# Altium PCB Siren_Buzzer Mounting PCB.PcbDoc
Units mm, origin at the board's own origin, x right, y up, seen from the top; angles counter-clockwise.
Board outline 22.1 x 21.72 mm, 2 copper layers (Top Layer, Bottom Layer); 2 components, 2 nets, 10 pads, 23 vias.
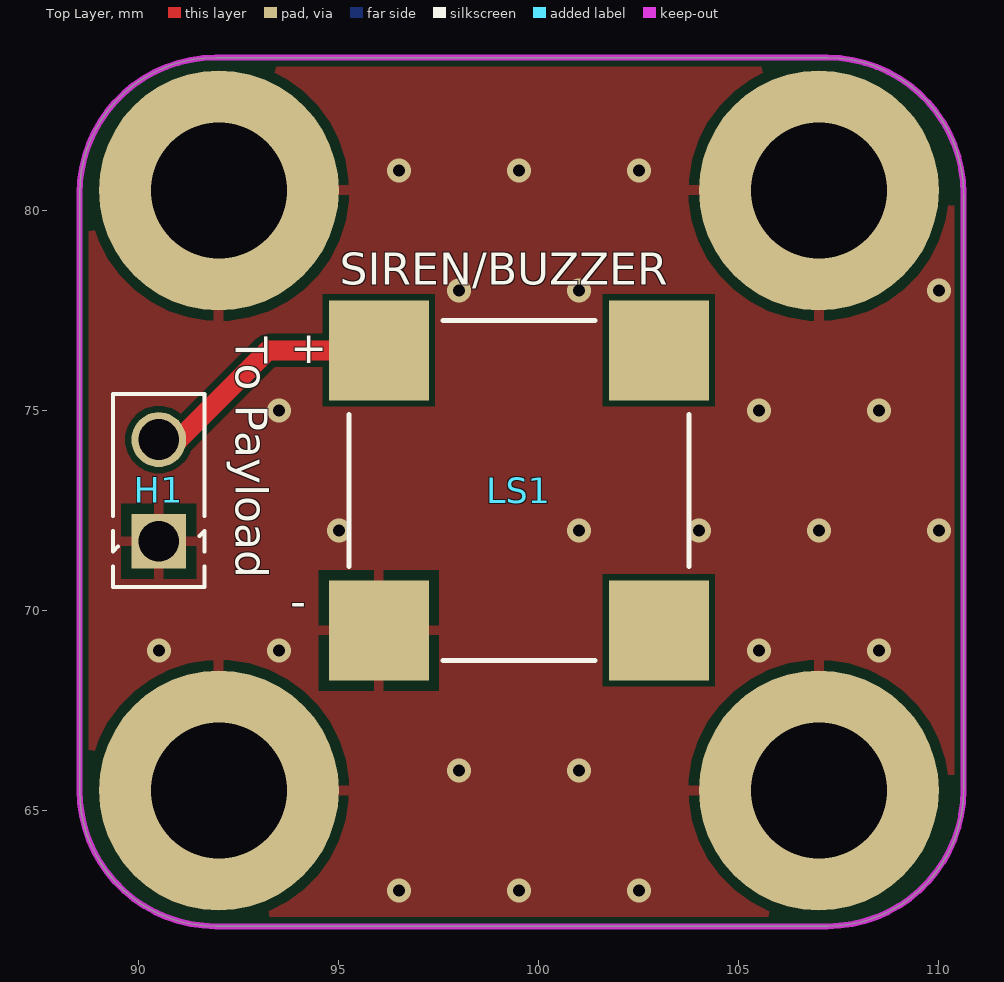
[diagram p0: Top Layer view]
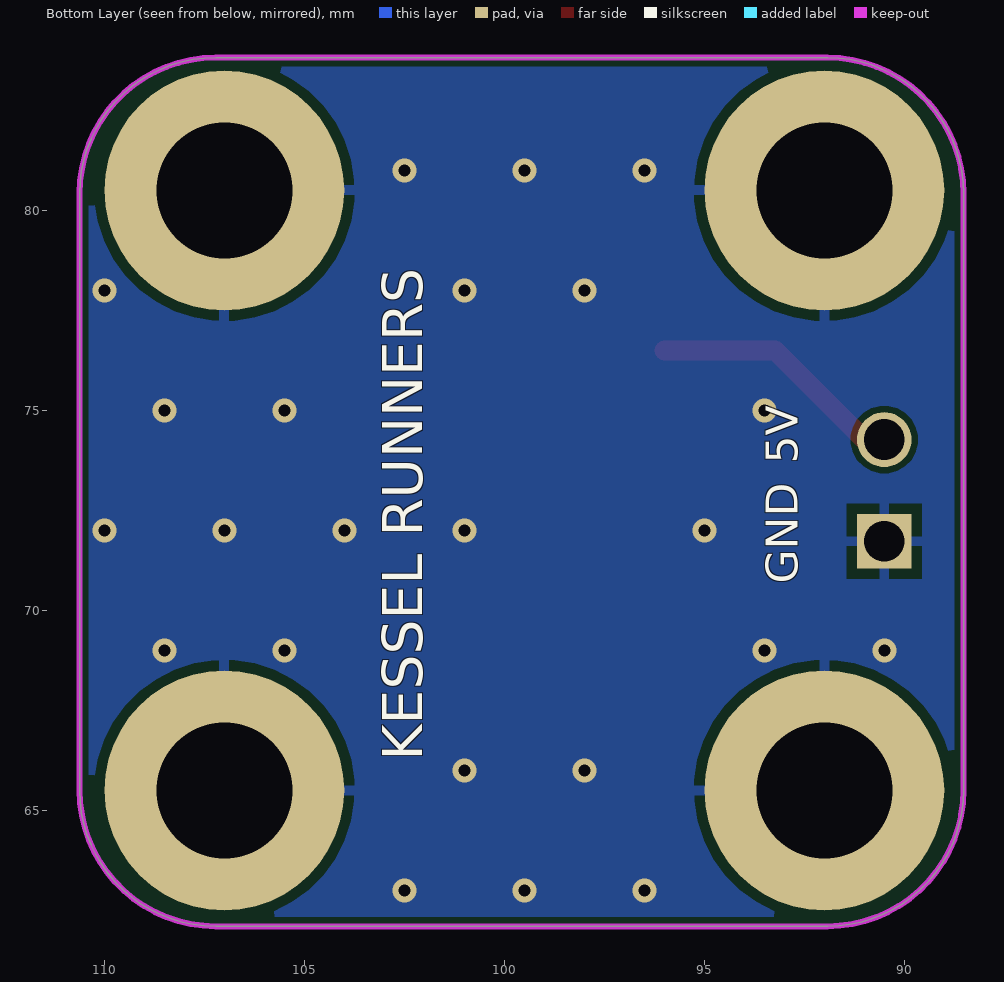
[diagram p1: Bottom Layer view, seen from below]

## Layer stack, top to bottom
Top Solder: solder mask 0.0102, Solder Resist, Dk 3.5
Top Layer: signal copper 0.0356
Dielectric 1: dielectric 0.32, FR-4, Dk 4.8
Bottom Layer: signal copper 0.0356
Bottom Solder: solder mask 0.0102, Solder Resist, Dk 3.5

## Board outline
88.519,65.503 88.519,80.42 cw(c91.919,80.42) 91.919,83.82 107.217,83.82 cw(c107.217,80.42) 110.617,80.42 110.617,65.503 cw(c107.217,65.503) 107.217,62.103 91.919,62.103 cw(c91.919,65.503)

## Design rules (kind name [scope] priority, off if disabled: settings)
Clearance [All] p1: gap=0.152 ignorepadtopadclearanceinfootprint=FALSE
HoleSize [All] p1: absolutevalues=TRUE maxlimit=6.2 minlimit=0.3 maxpercent=80.000 minpercent=20.000
MinimumAnnularRing [All] p1: minimumring=0.15
MinimumSolderMaskSliver [All] p1: minsoldermaskwidth=0.1
PolygonConnect ViaConnect [IsVia] p1: connectstyle=Direct reliefconductorwidth=0.254 reliefentries=4 polygonreliefangle="90 Angle" airgapwidth=0.254
PolygonConnect [All] p2: connectstyle=Relief reliefconductorwidth=0.254 reliefentries=4 polygonreliefangle="90 Angle" airgapwidth=0.254
RoutingVias [All] p1: holewidth=0.3 width=0.6 viastyle="Through Hole" minholewidth=0.3 minwidth=0.5 maxholewidth=1 maxwidth=5
SilkToSilkClearance [All] p1: silktosilkclearance=0.1
SilkToSolderMaskClearance [IsPad] p1: minsilkscreentomaskgap=0.1 clearancetoexposedcopper=TRUE
SolderMaskExpansion [All] p1: expansion=0.051 istentingtop=FALSE
SupplyNets "Schematic Supply Nets_1" [InNet('GND')] p1: voltage=0.000
SupplyNets "Schematic Supply Nets" [InNet('5V')] p2: voltage=0.000
Width [All] p1: maxlimit=25.4 minlimit=0.15 preferedwidth=0.3
26 further rules are at their usual default settings.

## Components (designator, comment, footprint, x,y, rotation, side; value= is the part's Value field where it differs from the comment)
H1 "2 Pin Header" "2 Pin Header" 90.5,73 r90 top
LS1 "CMT-8504-100-SMT-TR" XDCR_CMT-8504-100-SMT-TR 99.5,73 r0 top

## Footprints (in the part's own frame and the unit in brackets; to place one, negate y for a bottom-side part, rotate by r counter-clockwise, add the part's x,y. Pads: shape width x height; smd on the part's side, far side on the other; paste and mask are expansions set on the pad)
"2 Pin Header" [mm]
  rect 1.37x1.37 hole 1.02: 1(-1.27,0)
  round 1.37 hole 1.02: 2(1.27,0)
  silkscreen extent -2.41,-1.14 2.41,1.14
XDCR_CMT-8504-100-SMT-TR [mm]
  rect 2.5x2.5 smd: 1(3.5,3.5) 2(3.5,-3.5) N(-3.5,-3.5) P(-3.5,3.5)
  silkscreen extent -4.25,-4.25 4.25,4.25, body extent -4.25,-4.25 4.28,4.28, height 4

## Part data
LS1: "8.5 mm, 5 Vo-p, 100 dB, Surface Mount (SMT), Magnetic Audio Transducer Buzzer", Package="CUI Devices", Availability="In Stock", Check_prices=https://www.snapeda.com/parts/CMT-8504-100-SMT-TR/CUI+Devices/view-part/?ref=eda, CUI_purchase_URL=https://www.cuidevices.com/product/audio/buzzers/audio-transducers/cmt-8504-100-smt-tr?utm_source=snapeda.com&utm_medium=referral&utm_campaign=snapedaBOM, MF="CUI Devices", MP=CMT-8504-100-SMT-TR, Price=None, Purchase-URL=https://pricing.snapeda.com/search/part/CMT-8504-100-SMT-TR/?ref=eda, SnapEDA_Link=https://www.snapeda.com/parts/CMT-8504-100-SMT-TR/CUI+Devices/view-part/?ref=snap

## Free pads (board coordinates)
  round 6 hole 3.4: 2(92,65.5) 2(92,80.5) 2(107,65.5) 2(107,80.5)

## Via types
v1: diameter 0.6, hole 0.3, Top Layer to Bottom Layer, tented top, 23 vias

## Nets (pads, with @x,y where several pads share a name; then routed paths per layer and width w, separated by ;. In a path a pad name is that pad's centre, name@x,y a point inside that pad or via, vN(x,y) a via of type N, cw(c..) or ccw(c..) an arc to the next point about the centre after c; other vN are vias at no path point)
5V: H1.2 LS1.P | length 5.9
  Top Layer w0.5: H1.2@91,74.27 93.23,76.5 LS1.P
GND: H1.1 LS1.N pad.2
  other v1: 96.5,63 99.5,63 102.5,63 98,66 101,66 90.5,69 93.5,69 105.5,69 108.5,69 95,72 101,72 104,72 107,72 110,72 93.5,75 105.5,75 108.5,75 98,78 101,78 110,78 96.5,81 99.5,81 102.5,81
pads on no net: LS1.1 LS1.2

## Polygon pours and split planes (outlines as drawn)
GND on Bottom Layer "GND_L02_P003" (solid, pour order 3): 88.519,65.503 88.519,80.42 cw(c91.919,80.42) 91.919,83.82 107.217,83.82 cw(c107.217,80.42) 110.617,80.42 110.617,65.503 cw(c107.217,65.503) 107.217,62.103 91.919,62.103 cw(c91.919,65.503)
GND on Top Layer "GND_L01_P002" (solid, pour order 2): 88.519,65.503 88.519,80.42 cw(c91.919,80.42) 91.919,83.82 107.217,83.82 cw(c107.217,80.42) 110.617,80.42 110.617,65.503 cw(c107.217,65.503) 107.217,62.103 91.919,62.103 cw(c91.919,65.503)

## Keep-outs
Keep-Out Layer:
  lines w0.15: 88.519,65.503 ccw(c91.919,65.503) 91.919,62.103 ; 88.519,65.503 ccw(c91.919,65.503) 91.919,62.103 ; 88.519,65.503 88.519,80.42 ; 88.519,65.503 88.519,80.42 ; 88.519,80.42 cw(c91.919,80.42) 91.919,83.82 ; 88.519,80.42 cw(c91.919,80.42) 91.919,83.82 ; 91.919,62.103 107.217,62.103 ; 91.919,62.103 107.217,62.103 ; 91.919,83.82 107.217,83.82 ; 91.919,83.82 107.217,83.82 ; 107.217,62.103 ccw(c107.217,65.503) 110.617,65.503 ; 107.217,62.103 ccw(c107.217,65.503) 110.617,65.503 ; 107.217,83.82 cw(c107.217,80.42) 110.617,80.42 ; 107.217,83.82 cw(c107.217,80.42) 110.617,80.42 ; 110.617,65.503 110.617,80.42 ; 110.617,65.503 110.617,80.42

## Silkscreen, mask and mechanical layers (free items; w line width, h text height)
Top Overlay:
  text "SIREN/BUZZER" at 95.029,78.138 h0.8
  text "To Payload" at 92.427,76.84 h0.8 r270
Bottom Overlay:
  text "5V" at 92.66,73.66 h0.8 r270
  text "GND" at 92.66,70.66 h0.8 r270
  text "KESSEL RUNNERS" at 102.054,66.24 h1 r270
Board Outline:
  lines w0.15: 88.444,65.503 ccw(c91.919,65.503) 91.919,62.028 107.217,62.028 ccw(c107.217,65.503) 110.692,65.503 110.692,80.42 ccw(c107.217,80.42) 107.217,83.895 91.919,83.895 ccw(c91.919,80.42) 88.444,80.42 88.444,65.503

## Text inside footprints (layer, text, board x,y; h text height)
LS1: Top Overlay "-" at 93.785,69.825 h0.81; Top Overlay "+" at 93.785,76.175 h0.81; Mechanical 13 "+" at 93.785,76.175 h0.81; Mechanical 13 "-" at 93.785,69.825 h0.81